# Altium PCB UMParachuteContr.PcbDoc
Units mm, origin at the board's own origin, x right, y up, seen from the top; angles counter-clockwise.
Board outline 70 x 70 mm, 2 copper layers (Top Layer, Bottom Layer); 109 components, 71 nets, 416 pads, 4 vias.
Unrouted connection lines stored in the file: 271.
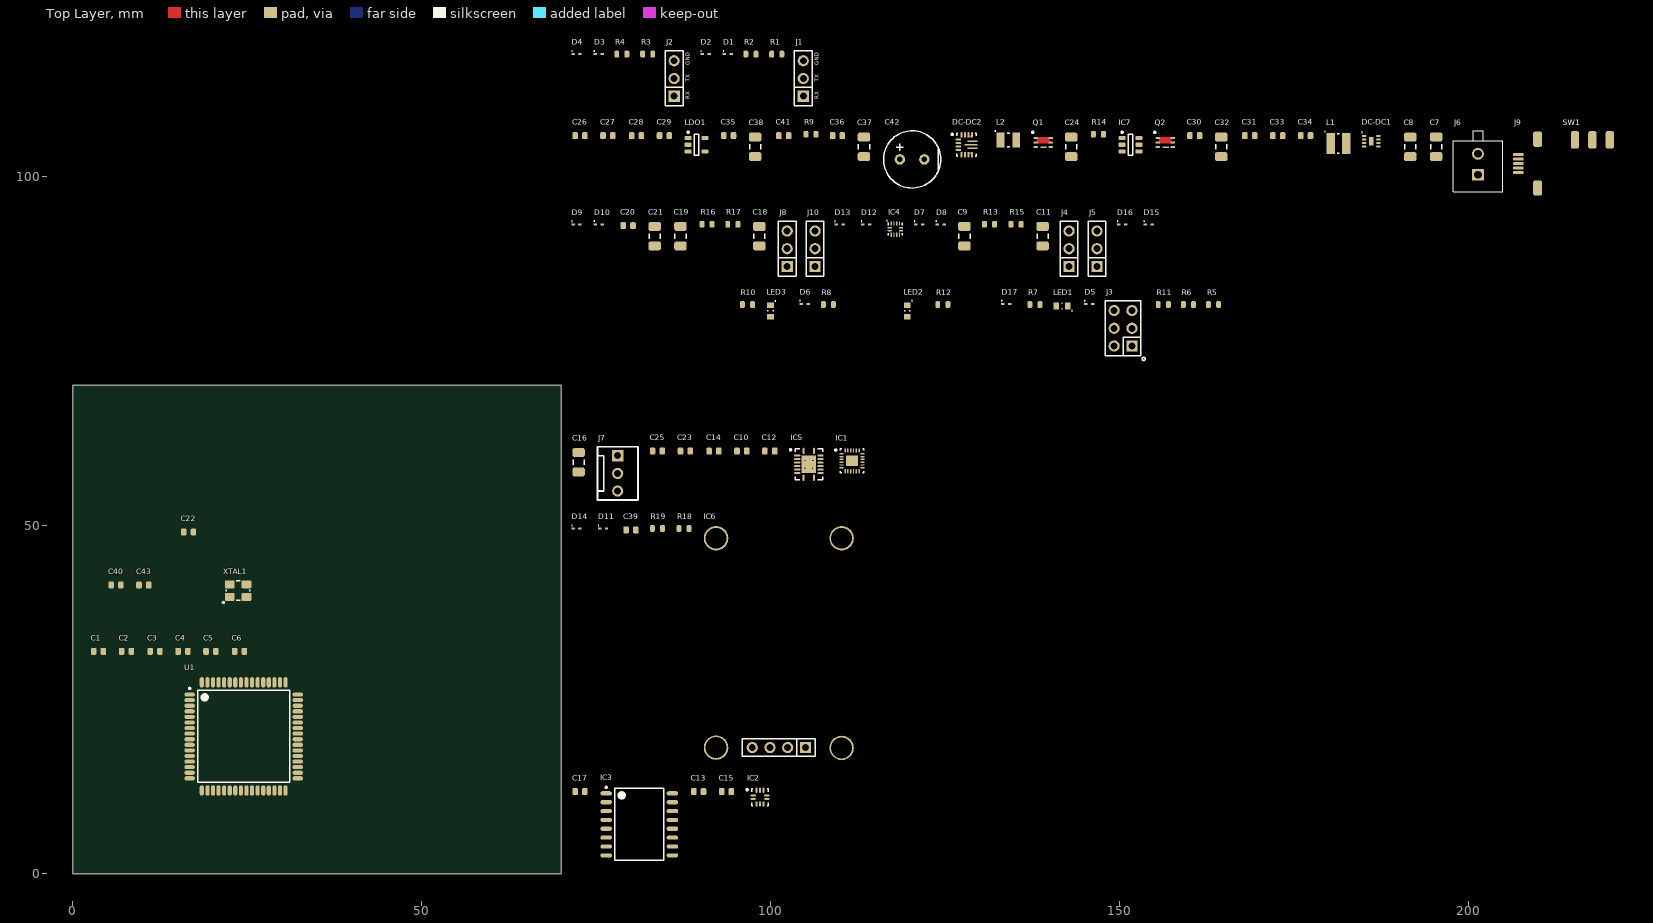
[diagram p0: Top Layer view]
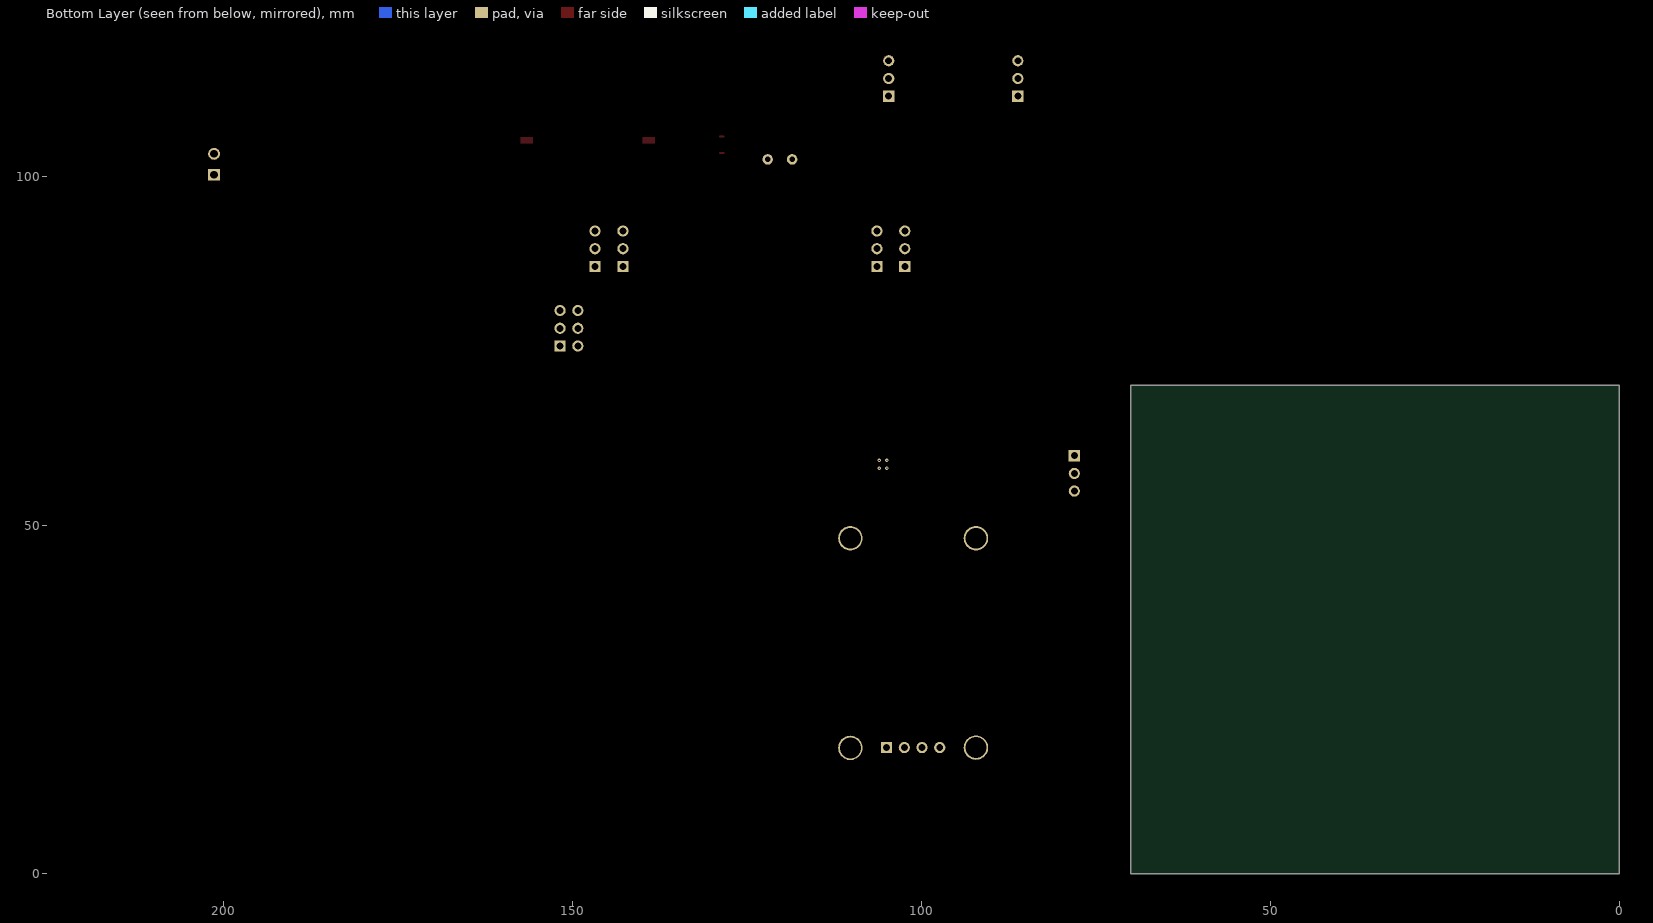
[diagram p1: Bottom Layer view, seen from below]

## Layer stack, top to bottom
Top Solder: solder mask 0.0102, Solder Resist, Dk 3.5
Top Layer: signal copper 0.0356
Dielectric 1: dielectric 0.32, FR-4, Dk 4.8
Bottom Layer: signal copper 0.0356
Bottom Solder: solder mask 0.0102, Solder Resist, Dk 3.5

## Board outline
0,0 70,0 70,70 0,70

## Design rules (kind name [scope] priority, off if disabled: settings)
Clearance [All] p1: gap=0.2 ignorepadtopadclearanceinfootprint=TRUE
PolygonConnect [All] p1: connectstyle=Relief reliefconductorwidth=0.254 reliefentries=4 polygonreliefangle="90 Angle" airgapwidth=0.254
RoutingVias [All] p1: holewidth=0.711 width=1.27 viastyle="Through Hole" minholewidth=0.711 minwidth=1.27 maxholewidth=0.711 maxwidth=1.27
SolderMaskExpansion [All] p1: expansion=0.102
Width [All] p1: maxlimit=1 minlimit=0.15 preferedwidth=0.2
30 further rules are at their usual default settings.

## Classes and differential pairs
component class U_Uarts: D1 D2 D3 D4 J1 J2 R1 R2 R3 R4
component class U_Power: C7 C8 C24 C26 C27 C28 C29 C30 C31 C32 C33 C34 C35 C36 C37 C38 C41 C42 DC-DC1 DC-DC2 IC7 J6 J9 L1 L2 LDO1 Q1 Q2 R9 R14 SW1
component class U_Motors: C9 C11 C18 C19 C20 C21 D7 D8 D9 D10 D12 D13 D15 D16 IC4 J4 J5 J8 J10 R13 R15 R16 R17
component class U_MCU: C1 C2 C3 C4 C5 C6 C22 C40 C43 D5 D6 D17 J3 LED1 LED2 LED3 R5 R6 R7 R8 R10 R11 R12 U1 XTAL1
component class U_IMUAndSonar: C10 C12 C14 C16 C23 C25 IC1 IC5 J7
component class U_GPS: C39 D11 D14 IC6 R18 R19
component class U_Barometers: C13 C15 C17 IC2 IC3

## Components (designator, comment, footprint, x,y, rotation, side; value= is the part's Value field where it differs from the comment)
C1 "100nF *V" "C0603 N" 3.7,31.9 r0 top
C2 "100nF *V" "C0603 N" 7.7,31.9 r0 top
C3 "100nF *V" "C0603 N" 11.8,31.9 r0 top
C4 "100nF *V" "C0603 N" 15.8,31.9 r0 top
C5 "100nF *V" "C0603 N" 19.8,31.9 r0 top
C6 "100nF *V" "C0603 N" 23.9,31.9 r0 top
C7 "10uF *V" "C1206 N" 195.4,104.2 r90 top
C8 "10uF *V" "C1206 N" 191.7,104.2 r90 top
C9 "10uF 25V" "C1206 N" 127.8,91.4 r90 top
C10 "100nF *V" "C0603 N" 95.9,60.6 r0 top
C11 "10uF 25V" "C1206 N" 139,91.4 r90 top
C12 "100nF *V" "C0603 N" 99.9,60.6 r0 top
C13 "100nF *V" "C0603 N" 89.7,11.8 r0 top
C14 "100nF *V" "C0603 N" 91.9,60.6 r0 top
C15 "100nF *V" "C0603 N" 93.7,11.8 r0 top
C16 "10uF *V" "C1206 N" 72.5,59 r90 top
C17 "100nF *V" "C0603 N" 72.7,11.8 r0 top
C18 "10uF 25V" "C1206 N" 98.4,91.4 r90 top
C19 "10uF 25V" "C1206 N" 87.1,91.4 r90 top
C20 "100nF *V" "C0603 N" 79.6,92.9 r0 top
C21 "100nF *V" "C1206 N" 83.4,91.4 r90 top
C22 "100nF *V" "C0603 N" 16.6,49 r0 top
C23 "100nF *V" "C0603 N" 87.8,60.6 r0 top
C24 "10uF *V" "C1206 N" 143.1,104.2 r90 top
C25 "100nF *V" "C0603 N" 83.8,60.6 r0 top
C26 "1uF *V" "C0603 N" 72.7,105.8 r0 top
C27 "100nF *V" "C0603 N" 76.7,105.8 r0 top
C28 "100nF *V" "C0603 N" 80.8,105.8 r0 top
C29 "4.7uF *V" "C0603 N" 84.8,105.8 r0 top
C30 "560pF *V" "C0603 N" 160.8,105.8 r0 top
C31 "100nF *V" "C0603 N" 168.7,105.8 r0 top
C32 "10uF *V" "C1206 N" 164.6,104.2 r90 top
C33 "100nF *V" "C0603 N" 172.7,105.8 r0 top
C34 "4.7uF *V" "C0603 N" 176.7,105.8 r0 top
C35 "100nF *V" "C0603 N" 94,105.8 r0 top
C36 "100nF *V" "C0603 N" 109.6,105.8 r0 top
C37 "22uF *V" "C1206 N" 113.4,104.2 r90 top
C38 "10uF *V" "C1206 N" 97.8,104.2 r90 top
C39 "1uF *V" "C0603 N" 80,49.3 r0 top
C40 "5pF *V" "C0603 N" 6.2,41.4 r0 top
C41 "100nF *V" "C0603 N" 101.9,105.8 r0 top
C42 "100uF *V" AL_8x12.5x3.5 120.3,102.4 r0 top
C43 "5pF *V" "C0603 N" 10.2,41.4 r0 top
D1 "ESD9L3.3ST5G" "SOD923F, NOMINAL" 93.9,117.5 r0 top
D2 "ESD9L3.3ST5G" "SOD923F, NOMINAL" 90.7,117.5 r0 top
D3 "ESD9L3.3ST5G" "SOD923F, NOMINAL" 75.4,117.5 r0 top
D4 "ESD9L3.3ST5G" "SOD923F, NOMINAL" 72.2,117.5 r0 top
D5 "ESD9L3.3ST5G" "SOD923F, NOMINAL" 145.7,81.7 r0 top
D6 "ESD9L3.3ST5G" "SOD923F, NOMINAL" 104.9,81.7 r0 top
D7 "ESD9L5.0ST5G" "SOD923F, NOMINAL" 121.3,93.1 r0 top
D8 "ESD9L5.0ST5G" "SOD923F, NOMINAL" 124.4,93.1 r0 top
D9 "ESD9L5.0ST5G" "SOD923F, NOMINAL" 72.2,93.1 r0 top
D10 "ESD9L5.0ST5G" "SOD923F, NOMINAL" 75.4,93.1 r0 top
D11 "ESD9L3.3ST5G" "SOD923F, NOMINAL" 76,49.5 r0 top
D12 "ESD9L5.0ST5G" "SOD923F, NOMINAL" 113.7,93.1 r0 top
D13 "ESD9L5.0ST5G" "SOD923F, NOMINAL" 109.9,93.1 r0 top
D14 "ESD9L3.3ST5G" "SOD923F, NOMINAL" 72.2,49.5 r0 top
D15 "ESD9L5.0ST5G" "SOD923F, NOMINAL" 154.2,93.1 r0 top
D16 "ESD9L5.0ST5G" "SOD923F, NOMINAL" 150.4,93.1 r0 top
D17 "ESD9L3.3ST5G" "SOD923F, NOMINAL" 133.8,81.7 r0 top
DC-DC1 "MIC23050" "QFN-8 2x2MM, NOMINAL" 186.1,105 r0 top
DC-DC2 "TPS63070" "VQFN-15, 2.5x3MM, NOMINAL" 128.1,104.5 r0 top
IC1 "ICM-20948" "QFN-24, 3x3MM, NOMINAL" 111.7,59.2 r0 top
IC2 "LPS22HBTR" "HLGA-10L, Nominal" 98.5,11 r0 top
IC3 "SM9333/6" "SOIC16, NOMINAL" 81.2,7.1 r0 top
IC4 "FXMA2104" "QFN12 1.8x1.8, NOMINAL" 117.9,92.4 r0 top
IC5 "TXB0106" "VQFN-16, 4x3.5MM, NOMINAL" 105.5,58.7 r0 top
IC6 "NEO-6M" "NEO-6M Module" 101.2,18.1 r90 top
IC7 "LTC4412" "SOT-23-6, NOMINAL" 151.6,104.5 r0 top
J1 "DebugUART" UART_HEADER 104.7,114 r90 top
J2 "ExtUART" UART_HEADER 86.2,114 r90 top
J3 "AVR PDI header" "Male 2x3 vertical" 151.8,78.2 r90 top
J4 "header 1x3 vertical" "Male 1x3 vertical" 142.8,89.6 r90 top
J5 "header 1x3 vertical" "Male 1x3 vertical" 146.8,89.6 r90 top
J6 "44914-0201" 44914-0201 201.4,101.7 r0 top
J7 "Molex 2.54 3pin" 22-27-2031 78.1,57.4 r90 top
J8 "header 1x3 vertical" "Male 1x3 vertical" 102.4,89.6 r90 top
J9 "MICRO-B" MICRO-B 209.7,101.8 r90 top
J10 "header 1x3 vertical" "Male 1x3 vertical" 106.4,89.6 r90 top
L1 "LPS3010-102MRB" LPS3010 181.4,104.7 r0 top
L2 "SRP2510A-1R5M" SRP2510A 134.1,105.2 r0 top
LDO1 "XC6221B182MR" "SOT-23-5, Nominal" 89.4,104.5 r0 top
LED1 "DebugLED1" "0603 NOMINAL" 141.8,81.4 r0 top
LED2 "DebugLED2" "0603 NOMINAL" 119.6,80.7 r90 top
LED3 "DebugLED3" "0603 NOMINAL" 100,80.7 r90 top
Q1 "SIA461DJ-T1-GE3" "SC70-6L POWERPACK" 139.1,104.8 r0 top
Q2 "SIA461DJ-T1-GE3" "SC70-6L POWERPACK" 156.6,104.8 r0 top
R1 "330R" R0603 100.9,117.5 r0 top
R2 "1K" R0603 97.2,117.5 r0 top
R3 "330R" R0603 82.4,117.5 r0 top
R4 "1K" R0603 78.7,117.5 r0 top
R5 "4.7K" R0603 163.5,81.6 r0 top
R6 "4.7K" R0603 159.9,81.6 r0 top
R7 "1.2K" R0603 137.9,81.6 r0 top
R8 "1.2K" R0603 108.3,81.6 r0 top
R9 "10K" R0603 105.8,106 r0 top
R10 "1.2K" R0603 96.7,81.6 r0 top
R11 "1K" R0603 156.3,81.6 r0 top
R12 "1K" R0603 124.7,81.6 r0 top
R13 "1K TBD" R0603 131.4,93.1 r0 top
R14 "470K" R0603 147,106 r0 top
R15 "1K TBD" R0603 135.2,93.1 r0 top
R16 "1K TBD" R0603 90.9,93.1 r0 top
R17 "1K TBD" R0603 94.6,93.1 r0 top
R18 "1K" R0603 87.6,49.5 r0 top
R19 "330R" R0603 83.8,49.5 r0 top
SW1 "JS102011SAQN" JS102011SAQN 217.8,102.2 r0 top
U1 "ATXMEGA256A3U" "TQFP-64, NOMINAL" 24.5,19.7 r0 top
XTAL1 "7M-16.000MAAJ-T" "7M 3.2x2.5mm" 23.7,40.6 r0 top

## Footprints (in the part's own frame and the unit in brackets; to place one, negate y for a bottom-side part, rotate by r counter-clockwise, add the part's x,y. Pads: shape width x height; smd on the part's side, far side on the other; paste and mask are expansions set on the pad)
"7M 3.2x2.5mm" [mm] "7M series crystal 3.2x2.5mm"
  rrect30% 1.4x1.15 smd: 1(-1.2,-0.9) 2(1.2,-0.9) 3(1.2,0.9) 4(-1.2,0.9)
  silkscreen extent -2.24,-1.84 1.7,1.4, body extent -1.7,-1.35 1.7,1.35, height 3.14
22-27-2031 [mm] "Molex KK 6410 series 3pin header"
  rect 1.6x1.6 hole 1: 1(2.54,0)
  round 1.6 hole 1: 2(0,0) 3(-2.54,0)
  silkscreen extent -3.81,-2.9 3.81,2.9, body extent -3.81,-2.9 3.81,2.9, height 11.72
"0603 NOMINAL" [mm] "Chip Diode, 2-Leads, Body 1,60x0,80mm, IPC Medium Density"
  rect 0.8x0.95 smd: A(-0.825,0) C(0.825,0)
  silkscreen extent -0.05,-0.74 1.49,0.38, body extent -0.8,-0.4 0.8,0.4, height 0.6
44914-0201 [mm] "Micro-Fit CPI Header, Capable Pin Interface, Dual Row, Vertical, 2 pin"
  round 0 hole 1.05 unplated: 0(-3,2.44) 0(3,2.44)
  rect 1.7x1.7 hole 1.1: 1(0,-1.5)
  round 1.7 hole 1.1: 2(0,1.5)
  silkscreen extent -3.58,-3.97 3.58,4.8, body extent -3.58,-3.97 3.57,4.8, height 9.91
AL_8x12.5x3.5 [mm] "Aluminium Electrolytic Cap, D 8mm, H 12.5mm, pitch 3.5mm"
  round 1.5 hole 0.8: 1(-1.75,0) 2(1.75,0)
  silkscreen extent -4.1,-4.1 4.1,4.1, body extent -4,-4 4.01,4, height 12.51
"C0603 N" [mm] "Chip Capacitor, 2-Leads, Body 1.68x0.80mm, IPC Medium Density"
  rrect50% 0.8x1 smd: 1(-0.7,0) 2(0.7,0)
  body extent -0.8,-0.4 0.8,0.4, height 0.8
"C1206 N" [mm] "Chip Capacitor, 2-Leads, Body 3.20x1.60mm, IPC Medium Density"
  rrect50% 1.3x1.8 smd: 1(-1.4,0) 2(1.4,0)
  silkscreen extent -0.35,-0.8 0.35,0.8, body extent -1.7,-0.9 1.7,0.9, height 1.25
"HLGA-10L, Nominal" [mm]
  oval 0.75x0.25 smd: 1(-0.975,0.25) 2(-0.975,-0.25) 6(0.975,-0.25) 7(0.975,0.25)
  oval 0.25x0.75 smd: 3(-0.5,-0.975) 4(0,-0.975) 5(0.5,-0.975) 8(0.5,0.975) 9(0,0.975) 10(-0.5,0.975)
  silkscreen extent -1.97,-1.2 1.2,1.2, body extent -1,-1 1,1, height 0.81
JS102011SAQN [mm]
  rrect50% 1.2x2.5 smd paste+0: 1(-2.5,3) 2(0,3) 3(2.5,3)
  rrect50% 0x0 hole 0.9 paste+0: 4(-3.4,0) 5(3.4,0)
  body extent -4.5,-3.75 4.5,3.75, height 3.51
LPS3010 [mm] "Chip Inductor, 2-Leads, Body 2,95x2,95mm, IPC High Density"
  rect 1.19x2.99 smd: 1(-1.11,0) 2(1.11,0)
  silkscreen extent -1.97,-1.39 0.15,1.76, body extent -1.51,-1.51 1.52,1.52, height 1.01
"Male 1x3 vertical" [mm]
  rect 1.6x1.6 hole 1: 1(-2.54,0)
  round 1.6 hole 1: 2(0,0) 3(2.54,0)
  silkscreen extent -3.94,-1.27 3.94,1.27, body extent -3.81,-1.27 3.81,1.27, height 8.54
"Male 2x3 vertical" [mm]
  rect 1.6x1.6 hole 1: 1(-2.54,0)
  round 1.6 hole 1: 2(-2.54,2.54) 3(0,0) 4(0,2.54) 5(2.54,0) 6(2.54,2.54)
  silkscreen extent -4.62,-1.92 3.94,3.81, body extent -3.81,-1.27 3.81,3.81, height 8.54
MICRO-B [mm]
  rrect50% 0.45x1.5 smd: 1(-1.3,2.5) 2(-0.65,2.5) 3(0,2.5) 4(0.65,2.5) 5(1.3,2.5)
  rrect50% 2.2x1.3 smd: 6(-3.5,-0.25) 6(3.5,-0.25)
  body extent -3.9,-2.35 3.9,2.65, height 2.69
"NEO-6M Module" [mm]
  rect 1.6x1.6 hole 1: 1(0,-3.81)
  round 1.6 hole 1: 2(0,-1.27) 3(0,1.27) 4(0,3.81)
  round 3.5 hole 3: 5(-0.05,-9) 5(0,9) 5(30,-9) 5(30,9)
  silkscreen extent -1.27,-5.21 1.27,5.21, body extent -2,-11 32,11, height 10
"QFN12 1.8x1.8, NOMINAL" [mm] "QFN, 12-Leads, Body 1,80x1,80mm, Pitch 0,40mm, IPC Medium Density"
  rrect50% 0.6x0.2 smd: 1(-0.8,0.2) 2(-0.8,-0.2) 7(0.8,-0.2) 8(0.8,0.2)
  rrect50% 0.2x0.6 smd: 3(-0.6,-0.8) 4(-0.2,-0.8) 5(0.2,-0.8) 6(0.6,-0.8) 9(0.6,0.8) 10(0.2,0.8) 11(-0.2,0.8) 12(-0.6,0.8)
  silkscreen extent -1.25,-0.9 1,1.25, body extent -0.91,-0.91 0.91,0.91, height 0.61
"QFN-8 2x2MM, NOMINAL" [mm] "QFN, 8-Leads, Body 2,00x2,00mm, Pitch 1,50mm/0,50mm, Thermal Pad 0,60x1,20mm, IPC Medium Density"
  oval 0.65x0.25 smd: 1(-1.025,0.75) 2(-1.025,0.25) 3(-1.025,-0.25) 4(-1.025,-0.75) 5(1.025,-0.75) 6(1.025,-0.25) 7(1.025,0.25) 8(1.025,0.75)
  rect 0.6x1.2 smd: 8(0,0)
  silkscreen extent -1.35,1.25 -1.25,1.35, body extent -1.05,-1 1.05,1, height 0.96
"QFN-24, 3x3MM, NOMINAL" [mm] "QFN, 24-Leads, Body 3,00x3,00mm, Pitch 0,40mm, Thermal Pad 1,70x1,54mm, IPC Medium Density"
  oval 0.6x0.2 smd: 1(-1.5,1) 2(-1.5,0.6) 3(-1.5,0.2) 4(-1.5,-0.2) 5(-1.5,-0.6) 6(-1.5,-1) 13(1.5,-1) 14(1.5,-0.6) 15(1.5,-0.2) 16(1.5,0.2) 17(1.5,0.6) 18(1.5,1)
  oval 0.2x0.6 smd: 7(-1,-1.5) 8(-0.6,-1.5) 9(-0.2,-1.5) 10(0.2,-1.5) 11(0.6,-1.5) 12(1,-1.5) 19(1,1.5) 20(0.6,1.5) 21(0.2,1.5) 22(-0.2,1.5) 23(-0.6,1.5) 24(-1,1.5)
  rect 1.7x1.54 smd: 25(0,0)
  silkscreen extent -2.47,-1.7 1.7,1.7, body extent -1.51,-1.51 1.5,1.5, height 1.01
R0603 [mm] "0603 Resistor, Nominal, Round"
  rrect50% 0.7x0.95 smd: 1(-0.725,0) 2(0.725,0)
  body extent -0.8,-0.4 0.8,0.4, height 0.45
"SC70-6L POWERPACK" [mm] "QFN, 6-Leads, Body 2,15x2,05mm, Pitch 0,65mm, IPC Medium Density"
  oval 0.65x0.3 smd: D(-1.075,0) D(-1.075,0.65) D(1.075,0) D(1.075,0.65) G(-1.075,-0.65) S(1.075,-0.65)
  rect 0.87x0.235 smd: S(0.05,-0.65)
  Top Layer region: -0.9,-0.15 0.9,-0.15 0.9,0.8 -0.9,0.8
  silkscreen extent -1.65,1.35 -1.4,1.6, body extent -1.03,-1.03 1.03,1.02, height 0.79
"SOD923F, NOMINAL" [mm] "SODFL, 2-Leads, Body 0,60x1,00mm, IPC Medium Density"
  rrect50% 0.5x0.3 smd: A(0.5,0) C(-0.5,0)
  silkscreen extent -0.7,0.4 -0.6,0.5, body extent -0.52,-0.32 0.53,0.33, height 0.44
"SOIC16, NOMINAL" [mm] "SOIC, 16-Leads, Body 10,26x7,52mm, Pitch 1,27mm, IPC Medium Density"
  oval 1.65x0.6 smd: 1(-4.75,4.445) 2(-4.75,3.175) 3(-4.75,1.905) 4(-4.75,0.635) 5(-4.75,-0.635) 6(-4.75,-1.905) 7(-4.75,-3.175) 8(-4.75,-4.445) 9(4.75,-4.445) 10(4.75,-3.175) 11(4.75,-1.905) 12(4.75,-0.635) 13(4.75,0.635) 14(4.75,1.905) 15(4.75,3.175) 16(4.75,4.445)
  silkscreen extent -4.87,-5.15 3.52,5.42, body extent -5.15,-5.1 5.15,5.1, height 3.51
"SOT-23-5, Nominal" [mm] "SOT23, 5-Leads, Body 2.90x2.38mm, Pitch 0.95mm, IPC Medium Density"
  rrect50% 1x0.6 smd: 1(-1.2,0.95) 2(-1.2,0) 3(-1.2,-0.95) 4(1.2,-0.95) 5(1.2,0.95)
  silkscreen extent -1.32,-1.5 0.3,1.92, body extent -1.4,-1.45 1.4,1.45, height 1.45
"SOT-23-6, NOMINAL" [mm] "SOT23, 6-Leads, Body 2.90x2.45mm, Pitch 0.95mm, IPC Medium Density"
  rrect50% 1x0.6 smd: 1(-1.2,0.95) 2(-1.2,0) 3(-1.2,-0.95) 4(1.2,-0.95) 5(1.2,0) 6(1.2,0.95)
  silkscreen extent -1.32,-1.5 0.3,1.92, body extent -1.17,-1.46 1.17,1.46, height 1
SRP2510A [mm] "Chip Inductor, 2-Leads, Body 2,50x2,00mm, IPC Medium Density"
  rect 1.1x2.14 smd: 1(-1.13,0) 2(1.13,0)
  silkscreen extent -1.94,-0.97 0.2,1.33, body extent -1.25,-1 1.25,1, height 1
"TQFP-64, NOMINAL" [mm] "TQFP, 64-Leads, Body 14,00x14,00mm, Pitch 0,80mm, IPC Medium Density"
  oval 1.5x0.6 smd: 1(-7.75,6) 2(-7.75,5.2) 3(-7.75,4.4) 4(-7.75,3.6) 5(-7.75,2.8) 6(-7.75,2) 7(-7.75,1.2) 8(-7.75,0.4) 9(-7.75,-0.4) 10(-7.75,-1.2) 11(-7.75,-2) 12(-7.75,-2.8) 13(-7.75,-3.6) 14(-7.75,-4.4) 15(-7.75,-5.2) 16(-7.75,-6) 33(7.75,-6) 34(7.75,-5.2) 35(7.75,-4.4) 36(7.75,-3.6) 37(7.75,-2.8) 38(7.75,-2) 39(7.75,-1.2) 40(7.75,-0.4) 41(7.75,0.4) 42(7.75,1.2) 43(7.75,2) 44(7.75,2.8) 45(7.75,3.6) 46(7.75,4.4) 47(7.75,5.2) 48(7.75,6)
  oval 0.6x1.5 smd: 17(-6,-7.75) 18(-5.2,-7.75) 19(-4.4,-7.75) 20(-3.6,-7.75) 21(-2.8,-7.75) 22(-2,-7.75) 23(-1.2,-7.75) 24(-0.4,-7.75) 25(0.4,-7.75) 26(1.2,-7.75) 27(2,-7.75) 28(2.8,-7.75) 29(3.6,-7.75) 30(4.4,-7.75) 31(5.2,-7.75) 32(6,-7.75) 49(6,7.75) 50(5.2,7.75) 51(4.4,7.75) 52(3.6,7.75) 53(2.8,7.75) 54(2,7.75) 55(1.2,7.75) 56(0.4,7.75) 57(-0.4,7.75) 58(-1.2,7.75) 59(-2,7.75) 60(-2.8,7.75) 61(-3.6,7.75) 62(-4.4,7.75) 63(-5.2,7.75) 64(-6,7.75)
  silkscreen extent -7.87,-6.6 6.6,7, body extent -8,-8 8,8, height 1.11
UART_HEADER [mm]
  rect 1.6x1.6 hole 1: 1(-2.54,0)
  round 1.6 hole 1: 2(0,0) 3(2.54,0)
  silkscreen extent -3.94,-1.27 3.94,1.27, body extent -3.81,-1.27 3.81,1.27, height 8.54
"VQFN-15, 2.5x3MM, NOMINAL" [mm] "QFN, 15-Leads, Body 2,50x3,00mm, Pitch 0,50mm, IPC Medium Density"
  oval 0.8x0.25 smd: 1(-1.175,0.75) 2(-1.175,0.25) 3(-1.175,-0.25) 4(-1.175,-0.75)
  oval 0.25x0.8 smd: 5(-0.725,-1.425) 6(-0.225,-1.425) 7(0.275,-1.425) 8(0.775,-1.425) 12(0.775,1.425) 13(0.275,1.425) 14(-0.225,1.425) 15(-0.725,1.425)
  oval 1.5x0.25 smd: 9(0.85,-0.5) 11(0.85,0.5)
  oval 1.9x0.25 smd: 10(0.65,0)
  Top Layer lines w0.3: 0.3,-1.175 0.75,-1.175 ; 0.3,1.175 0.75,1.175
  silkscreen extent -2.17,-1.65 1.4,1.65, body extent -1.3,-1.55 1.3,1.55, height 1.05
"VQFN-16, 4x3.5MM, NOMINAL" [mm] "QFN, 16-Leads, Body 3,50x4,00mm, Pitch 1,50mm/0,50mm, Thermal Pad 2,05x2,55mm, IPC Medium Density"
  oval 0.25x0.9 smd: 1(-0.75,1.925) 8(-0.75,-1.925) 9(0.75,-1.925) 16(0.75,1.925)
  oval 0.9x0.25 smd: 2(-1.675,1.25) 3(-1.675,0.75) 4(-1.675,0.25) 5(-1.675,-0.25) 6(-1.675,-0.75) 7(-1.675,-1.25) 10(1.675,-1.25) 11(1.675,-0.75) 12(1.675,-0.25) 13(1.675,0.25) 14(1.675,0.75) 15(1.675,1.25)
  rect 2.05x2.55 smd: 9(0,0)
  silkscreen extent -2.75,-2.22 1.97,2.22, body extent -1.83,-2.07 1.83,2.07, height 1

## Part data
C1 C2 C3 C4 C5 C6 C10 C12 C13 C14 C15 C17 C20 C21 C22 C23 C25 C27 C28 C31 C33 C35 C36 C41: library part Capacitor, "Ceramic capacitor", Capacitance=100nF, Voltage rating=*V, Note=CurrentFootprint, Type=MLCC
C7 C8 C16 C24 C32 C38: library part Capacitor, "Ceramic capacitor", Capacitance=10uF, Voltage rating=*V, Note=CurrentFootprint, Type=MLCC
C9 C11 C18 C19: library part Capacitor, "Ceramic capacitor", Capacitance=10uF, Voltage rating=25V, Characteristic=X7R, Note=CurrentFootprint, Type=MLCC
C26 C39: library part Capacitor, "Ceramic capacitor", Capacitance=1uF, Voltage rating=*V, Note=CurrentFootprint, Type=MLCC
C29 C34: library part Capacitor, "Ceramic capacitor", Capacitance=4.7uF, Voltage rating=*V, Note=CurrentFootprint, Type=MLCC
C30: library part Capacitor, "Ceramic capacitor", Capacitance=560pF, Voltage rating=*V, Note=CurrentFootprint, Type=MLCC
C37: library part Capacitor, "Ceramic capacitor", Capacitance=22uF, Voltage rating=*V, Note=CurrentFootprint, Type=MLCC
C40 C43: library part Capacitor, "Ceramic capacitor", Capacitance=5pF, Voltage rating=*V, Note=CurrentFootprint, Type=MLCC
C42: library part "Capacitor Polarized", "Polarized Capacitor", Capacitance=100uF, Temp MAX=*C, Voltage rating=*V, ESR=*R, Note=CurrentFootprint, Temp MIN=*C
D1 D2 D3 D4 D5 D6 D11 D14 D17: "TVS DIODE, Unidir, 3.3V/9V, 150mW, SOD-923, ESD9L3.3ST5G, ON SEMICONDUCTOR", Breakdown Voltage=4.8V, Case/Package=SOD-923-2, Clamping Voltage=9V, Leakage Current=1uA, Manufacturer="ON Semiconductor", Operating Temperature Range="-55 .. 125°C", Peak Pulse Current=1A, Peak Pulse Power=150mW, Reverse Standoff Voltage=3.3V, Supplier Part Number 1=2533269, ComponentLink1Description=Datasheet, ComponentLink1URL=https://www.verical.com/server-webapp/html/getDatasheet?partID=148186&src-supplier=Verical, Manufacturer Part Number=ESD9L3.3ST5G, Supplier 1=Farnell
D7 D8 D9 D10 D12 D13 D15 D16: "TVS DIODE, Unidir, 5V/9.8V, 150mW, SOD-923, ESD9L5.0ST5G, ON SEMICONDUCTOR", Breakdown Voltage="5.4 .. 5.8V", Clamping Voltage=9.8V, Leakage Current=1uA, Manufacturer="ON Semiconductor", Max Surge Current=1A, Operating Supply Voltage=5V, Operating Temperature Range="-55 .. 150°C", Peak Pulse Power=150mW, Supplier Part Number 1=1651639RL, ComponentLink1Description=Datasheet, ComponentLink1URL=http://www.mouser.com/ds/2/308/ESD9L-D-278322.pdf?src-supplier=Mouser, Manufacturer Part Number=ESD9L5.0ST5G, Peak Pulse Current=1A, Reverse Standoff Voltage=5V, Supplier 1=Farnell, Supplier 2=TME, Supplier Part Number 2=ESD9L5.0ST5G
DC-DC1: "DC-DC CONVERTER, 3.3Vout, 600mA, 2.7-5.5Vin, MIC23050, MICREL", Supplier Part Number 1=2920748, ComponentLink1Description=Datasheet, ComponentLink1URL=http://ww1.microchip.com/downloads/en/DeviceDoc/mic23050.pdf, Supplier 1=Farnell
DC-DC2: "DC-DC CONVERTER, 5Vout, 2 .. 16Vin, buck-boost, 2A, TPS63070, TEXAS INSTRUMENTS", Supplier Part Number 1=3008245, ComponentLink1Description=Datasheet, ComponentLink1URL=http://www.ti.com/lit/ds/symlink/tps63070.pdf, Supplier 1=Farnell
IC1: "9-axis IMU, SPI and I2C, 1.8Vin, 24QFN", Supplier Part Number 1=2911498, ComponentLink1Description=Datasheet, ComponentLink1URL=https://www.invensense.com/wp-content/uploads/2016/06/DS-000189-ICM-20948-v1.3.pdf, Supplier 1=Farnell
IC2: "Pressure Sensor, 260-1260 hPa, 1Hz...75Hz, 1.7...3.6Vin, 12uA, 24-bit, LPS22HBTR, HLGA-10L, STMicroelectronics", Supplier Part Number 1=2532382, ComponentLink1Description=Datasheet, ComponentLink1URL=https://www.st.com/resource/en/datasheet/lps22hb.pdf, Supplier 1=Farnell
IC3: "Differentsial sensor, 125 or 250 Pa, 2000Hz, 3.0-5.5Vin", ComponentLink1Description=Datasheet, ComponentLink1URL=https://www.mouser.com/datasheet/2/589/Datasheet_SM9333_SM9336-1317493.pdf
IC4: "Level shifter, 4 inputs, 1.65 .. 5.5Vin, 3ns delay, FXMA2104, ON SEMICONDUCTOR", Supplier Part Number 1=2822577, ComponentLink1Description=Datasheet, ComponentLink1URL=http://www.farnell.com/datasheets/2552660.pdf?_ga=2.61529188.991561592.1575804886-1961576694.1568451101, Supplier 1=Farnell
IC5: "Level shifter, 6 inputs, 1.2 .. 5.5Vin, 4ns delay, TXB0106, TEXAS INSTRUMENTS", Supplier Part Number 1=3120970, ComponentLink1Description=Datasheet, ComponentLink1URL=http://www.ti.com/lit/ds/symlink/txb0106.pdf, Supplier 1=Farnell
IC6: "GPS GLONASS module with antenna, +-2m, -162dBm, 3 .. 5Vin", ComponentLink1Description=Datasheet, ComponentLink1URL=https://www.u-blox.com/sites/default/files/products/documents/NEO-6_DataSheet_(GPS.G6-HW-09005).pdf
IC7: "Hot Swap Controller, 2.5 .. 28Vin, 11uA, LTC4412, LINEAR TECHNOLOGY", Supplier Part Number 1=584-LTC4412ES6#TRPBF, ComponentLink1Description=Datasheet, ComponentLink1URL=https://www.mouser.ee/datasheet/2/609/4412fb-1268394.pdf, Supplier 1=Mouser
J1 J2: library part "header 1x3 vertical"
J3: library part "AVR PDI header 2x3 male", "Male header 2x3, PDI"
J6: "MicroFit 2-pin CPI Header, 2 Row, Vertical", Color=Black, Current Rating=5A, Flammability Rating="UL94 V-0", Manufacturer=Molex, Operating Temperature=-40...105°C, Package Quantity=3168, Supplier Part Number 1=538-44914-0201, Voltage rating=250V, ComponentLink1Description=http://www.mouser.com/ds/2/276/0449140201_PCB_HEADERS-146076.pdf?src-supplier=Mouser, ComponentLink1URL=http://www.mouser.com/ds/2/276/0449140201_PCB_HEADERS-146076.pdf?src-supplier=Mouser, ComponentLink2Description=http://www.onlinecomponents.com/productFiles/mf-MOL/0449140201_pcb_headers.pdf?src-supplier=Onlinecomponents.com, ComponentLink2URL=http://www.onlinecomponents.com/productFiles/mf-MOL/0449140201_pcb_headers.pdf?src-supplier=Onlinecomponents.com, Contact Plating=Tin, Glow Wire Compliant=Compliant, Halogen Free="Low Halogen", Housing Material=Thermoplastic, Manufacturer Part Number=44914-0201, Mount="Through Hole", Number of Circuits=2, Number of Contacts=2, Number of Positions=2, Number of Rows=2, Orientation=Vertical, Packaging=Tray, Pitch=3mm, REACH SVHC="No SVHC", Row Spacing=3mm, Stock 1=1889, Supplier 1=Mouser, Termination=Solder, Voltage Rating (DC)=250V
J7: library part "Molex header, 3 pin, KK 6410 series", "Molex header, 3 pin, KK 6410 series", Current Rating=4A, Manufacturer Part Number=22-27-2031, Supplier Part Number 1=9731156, ComponentLink1Description=Datasheet, ComponentLink1URL=http://www.farnell.com/datasheets/1023435.pdf, ComponentLink2Description=Drawing, ComponentLink2URL=http://www.farnell.com/cad/1595526.pdf, Product Range="KK 6410 Series", Supplier 1=Farnell, Supplier 2=Mouser, Supplier 3=TME, Supplier Part Number 2=538-22-27-2031, Supplier Part Number 3=MX-6410-03A
J9: "Micro USB 2.0 type B, receptacle", Manufacturer=Molex, Manufacturer Part Number=47346-1001, Operating Temperature Range="-30 .. 85°C", Supplier Part Number 1=2779944, ComponentLink1Description=Datasheet, ComponentLink1URL=http://www.farnell.com/datasheets/2696879.pdf, Orientation="Right Angle", Pitch=0.65mm, Supplier 1=Farnell, Supplier 2=Mouser, Supplier Part Number 2=538-47346-1001
L1: "Inductor, 1uH, 85mR, 1.1A, LPS3010-102MRB, COILCRAFT", Supplier Part Number 1=2407993, ComponentLink1Description=Datasheet, ComponentLink1URL=http://www.farnell.com/datasheets/1805320.pdf?_ga=2.2931576.991561592.1575804886-1961576694.1568451101, Supplier 1=Farnell, Supplier 2=Mouser, Supplier Part Number 2=994-LPS3010-102MRB
L2: "Inductor, 1.5uH, 91mR, 2.5A, Bourns, SRP2510A-1R5M", Supplier Part Number 1=2774127, ComponentLink1Description=Datasheet, ComponentLink1URL=http://www.farnell.com/datasheets/2330876.pdf?_ga=2.69385304.991561592.1575804886-1961576694.1568451101, Supplier 1=Farnell
LDO1: "LDO, 1.8Vout, 1.6-6Vin, SOT-25, SMD,  HIGH SPEED LOW NOISE, TOREX - XC6221B182MR", Current - Output=200mA, Dropout Voltage Vdo="0.125V @ 100mA", Fixed Output Voltage Nom.=1.8V, Input Voltage Max=6V, LDO Regulator Case Style=SOT-25, Manufacturer=TOREX, Operating Temperature Range="-40°C to +85", Supplier Part Number 1=1454268, Accuracy %=2%, ComponentLink2Description=Datasheet, ComponentLink2URL=http://www.torex.co.jp/english/products/voltage_regulators/data/XC6221.pdf, Manufacturer Part Number=XC6221B182MR, Output Current Max=200mA, Supplier 1=Farnell, Supplier 2=Digi-Key, Supplier Part Number 2=893-1096-6-ND
LED1 LED2 LED3: library part "Generic LED", "SMD mono-color Chip LED", Color=Green
Q1 Q2: "MOSFET, P, 20V, 12A, PowerPAK SC-70-6L, SIA461DJ-T1-GE3, VISHAY", Supplier Part Number 1=2283658, ComponentLink1Description=Datasheet, ComponentLink1URL=http://www.farnell.com/datasheets/2050122.pdf?_ga=2.240431691.991561592.1575804886-1961576694.1568451101, Supplier 1=Farnell
R1 R2 R3 R4 R5 R6 R7 R8 R9 R10 R11 R12 R13 R14 R15 R16 R17 R18 R19: library part Resistor, "Resistor", Power rating=*mW, Temp coefficient=*ppm, Voltage rating=*V, Note=CurrentFootprint, Precision=*%
  R1 R3 R19: Resistance=330R
  R2 R4 R11 R12 R18: Resistance=1K
  R5 R6: Resistance=4.7K
  R7 R8 R10: Resistance=1.2K
  R9: Resistance=10K
  R13 R15 R16 R17: Resistance="1K TBD"
  R14: Resistance=470K
SW1: Contact Current Rating=300mA, Contact Resistance=70mR, Manufacturer="ITT C&K", Max Voltage Rating (DC)=6V, Operating Temperature Range="-40 .. 85°C", Supplier Part Number 1=2320017RL, ComponentLink1Description=Datasheet, ComponentLink1URL=http://www.farnell.com/datasheets/2044601.pdf?src-supplier=Element14, ComponentLink2Description=http://www1.futureelectronics.com/doc/C%20-%20K%20COMPONENTS/JS102011SAQN.pdf?src-supplier=Future+Electronics, ComponentLink2URL=http://www1.futureelectronics.com/doc/C%20-%20K%20COMPONENTS/JS102011SAQN.pdf?src-supplier=Future+Electronics, ComponentLink3Description=https://www.verical.com/server-webapp/html/getDatasheet?partID=313004&src-supplier=Verical, ComponentLink3URL=https://www.verical.com/server-webapp/html/getDatasheet?partID=313004&src-supplier=Verical, ComponentLink4Description=https://www.ckswitches.com/media/1422/js.pdf?src-supplier=Digi-Key, ComponentLink4URL=https://www.ckswitches.com/media/1422/js.pdf?src-supplier=Digi-Key, ComponentLink5Description=http://www.ck-components.com/14398/js_1nov12.pdf/?src-supplier=Avnet, ComponentLink5URL=http://www.ck-components.com/14398/js_1nov12.pdf/?src-supplier=Avnet, ComponentLink6Description=http://www.ck-components.com/14398/js_1nov12.pdf/?src-supplier=Avnet+Europe, ComponentLink6URL=http://www.ck-components.com/14398/js_1nov12.pdf/?src-supplier=Avnet+Europe, ComponentLink7Description=http://www.mouser.com/ds/2/60/JS_7jan16-221285.pdf?src-supplier=Mouser, ComponentLink7URL=http://www.mouser.com/ds/2/60/JS_7jan16-221285.pdf?src-supplier=Mouser, Current Rating=300mA, Electrical Life=5000Cycles, Manufacturer Part Number=JS102011SAQN, Mount="Surface Mount", Orientation="Right Angle", Supplier 1=Farnell, Supplier Prt Number 1=2320017, Switch Function=On-On, Voltage Rating (DC)=6V
U1: "MCU, 8-bit, 256KB flash, 50 I/Os, ATXMEGA2563U, 64-TQFP, Microchip", Supplier Part Number 1=2066307, ComponentLink1Description=Datasheet, ComponentLink1URL=http://ww1.microchip.com/downloads/en/devicedoc/atmel-8386-8-and-16-bit-avr-microcontroller-atxmega64a3u-128a3u-192a3u-256a3u_datasheet.pdf, Supplier 1=Farnell
XTAL1: Case/Package=SMD/SMT, ESR (Equivalent Series Resistance)=100R, Frequency=16MHz, Frequency Stability=30ppm, Load Capacitance=18pF, Manufacturer=TXC, Operating Temperature Range="-10°C .. 70°C", Supplier Part Number 1=1842060, ComponentLink1Description=Datasheet, ComponentLink1URL=https://datasheet.ciiva.com/1356/number-crystal-basic-1356577.pdf, ComponentLink3Description=Datasheet, ComponentLink3URL=https://datasheet.ciiva.com/855/7m-855384.pdf, Dimensions=3.2mm*2.5mm, Frequency Tolerance=30ppm, Height=0.031inch, Length=3.2mm, Manufacturer Part Number=7M-16.000MAAJ-T, Pricing 1="1=1.09, 50=0.726, 100=0.642, 250=0.625, 500=0.608, 1000=0.516, 5000=0.506 (EUR)", Supplier 1=Farnell, Supplier 2=Mouser, Supplier Part Number 2=717-7M-16.000MAAJ-T, Tolerance=30ppm

## Via types
v1: diameter 0.5, hole 0.2, Top Layer to Bottom Layer, 4 vias

## Nets (pads, with @x,y where several pads share a name; then routed paths per layer and width w, separated by ;. In a path a pad name is that pad's centre, name@x,y a point inside that pad or via, vN(x,y) a via of type N, cw(c..) or ccw(c..) an arc to the next point about the centre after c; other vN are vias at no path point)
1V8: C10.2 C12.2 C25.2 C28.2 C29.2 IC1.8 IC1.13 IC5.2 IC5.8 LDO1.5
3V3: C1.2 C2.2 C3.2 C4.2 C5.2 C6.2 C13.2 C15.2 C16.2 C17.2 C20.2 C23.2 C26.2 C27.2 C30.2 C33.2 C34.2 C39.2 D17.C DC-DC1.4 IC2.1 IC2.10 IC3.5 IC3.6 IC4.2 IC4.8 IC5.15 IC6.1 J3.2 J7.1 L1.2 LDO1.1 LDO1.3 R5.2 R6.2 U1.15 U1.25 U1.35 U1.45 U1.53 U1.61 U1.62
5V: C9.2 C11.2 C18.2 C19.2 C21.2 C36.2 C37.2 C42.1 D12.C D13.C D15.C D16.C DC-DC2.5 DC-DC2.7 DC-DC2.8 IC4.1 J4.2 J5.2 J8.2 J10.2
DebugLED1: LED1.A U1.1
DebugLED2: LED2.A U1.2
DebugLED3: LED3.A U1.3
GND: C1.1 C2.1 C3.1 C4.1 C5.1 C6.1 C7.1 C8.1 C9.1 C10.1 C11.1 C12.1 C13.1 C14.1 C15.1 C16.1 C17.1 C18.1 C19.1 C20.1 C21.1 C22.1 C23.1 C24.1 C25.1 C26.1 C27.1 C28.1 C29.1 C31.1 C32.1 C33.1 C34.1 C35.1 C36.1 C37.1 C38.1 C39.1 C40.1 C41.1 C42.2 C43.1 D1.A D2.A D3.A D4.A D5.A D6.A D7.A D8.A D9.A D10.A D11.A D12.A D13.A D14.A D15.A D16.A D17.A DC-DC1.6 DC-DC1.8 DC-DC2.1 DC-DC2.4 DC-DC2.6 DC-DC2.10 DC-DC2.15 IC1.11 IC1.18 IC1.20 IC2.3 IC2.8 IC2.9 IC3.13 IC4.7 IC5.9 IC6.4 IC7.2 IC7.3 J1.3 J2.3 J3.6 J4.1 J5.1 J6.2 J7.3 J8.1 J9.5 J10.1 LDO1.2 R7.1 R8.1 R10.1 SW1.3 U1.14 U1.24 U1.34 U1.44 U1.52 U1.60 XTAL1.2 XTAL1.4
  other v1: 104.95,58.15 106.05,58.15 104.95,59.25 106.05,59.25
Interrupt: IC1.12 IC5.6
Left_1_PWM: IC4.10 R15.2
Left_2_PWM: IC4.12 R17.2
MISO: IC1.9 IC5.4
MOSI: IC1.24 IC5.3
NetC14_2: C14.2 IC1.10
NetC22_2: C22.2 J7.2 U1.63
NetC30_1: C30.1 DC-DC1.5
NetC35_2: C35.2 DC-DC2.3
NetD1_C: D1.C J1.1 R1.1
NetD2_C: D2.C J1.2 R2.1
NetD3_C: D3.C J2.1 R3.1
NetD4_C: D4.C J2.2 R4.1
NetD5_C: D5.C J3.1 R11.1
NetD6_C: D6.C J3.5 R12.1
NetD7_C: D7.C J4.3 R13.1
NetD8_C: D8.C J5.3 R15.1
NetD9_C: D9.C J8.3 R16.1
NetD10_C: D10.C J10.3 R17.1
NetD11_C: D11.C IC6.2 R18.1
NetD14_C: D14.C IC6.3 R19.1
NetDC-DC1_1: DC-DC1.1 L1.1
NetDC-DC2_9: DC-DC2.9 L2.2
NetDC-DC2_11: DC-DC2.11 L2.1
NetDC-DC2_14: DC-DC2.14 R9.1
NetIC2_2: IC2.2 U1.33
NetIC2_4: IC2.4 U1.31
NetIC2_5: IC2.5 U1.32
NetIC2_6: IC2.6 U1.30
NetIC2_7: IC2.7 U1.6
NetIC3_10: IC3.10 R5.1 U1.36
NetIC3_11: IC3.11 R6.1 U1.37
NetIC4_3: IC4.3 U1.16
NetIC4_4: IC4.4 U1.17
NetIC4_5: IC4.5 U1.18
NetIC4_6: IC4.6 U1.19
NetIC5_11: IC5.11 U1.7
NetIC5_12: IC5.12 U1.40
NetIC5_13: IC5.13 U1.42
NetIC5_14: IC5.14 U1.41
NetIC5_16: IC5.16 U1.43
NetIC7_4: IC7.4 Q1.G R14.1
NetIC7_5: IC7.5 Q2.G
NetLED1_C: LED1.C R7.2
NetLED2_C: LED2.C R8.2
NetLED3_C: LED3.C R10.2
NetR1_2: R1.2 U1.28
NetR2_2: R2.2 U1.29
NetR3_2: R3.2 U1.48
NetR4_2: R4.2 U1.49
NetR18_2: R18.2 U1.39
NetR19_2: R19.2 U1.38
PDI_CLOCK: R12.2 U1.57
PDI_DATA: R11.2 U1.56
PowerOn: DC-DC1.2 R9.2 SW1.2
Right_1_PWM: IC4.9 R13.2
Right_2_PWM: IC4.11 R16.2
SCK: IC1.23 IC5.1
SS: IC1.22 IC5.5
Vbat: C7.2 IC7.1 J6.1 Q2.D
Vcc: C24.2 C31.2 C32.2 C38.2 C41.2 DC-DC1.7 DC-DC2.12 DC-DC2.13 IC7.6 Q1.S Q2.S R14.2 SW1.1
Vusb: C8.2 J9.1 Q1.D
XTAL1: C43.2 U1.59 XTAL1.3
XTAL2: C40.2 U1.58 XTAL1.1
pads on no net: DC-DC1.3 DC-DC2.2 IC1.1 IC1.2 IC1.3 IC1.4 IC1.5 IC1.6 IC1.7 IC1.14 IC1.15 IC1.16 IC1.17 IC1.19 IC1.21 IC1.25 IC3.1 IC3.2 IC3.3 IC3.4 IC3.7 IC3.8 IC3.9 IC3.12 IC3.14 IC3.15 IC3.16 IC5.7 IC5.10 IC6.5 J3.3 J3.4 J6.0 J9.2 J9.3 J9.4 J9.6 LDO1.4 SW1.4 SW1.5 U1.4 U1.5 U1.8 U1.9 U1.10 U1.11 U1.12 U1.13 U1.20 U1.21 U1.22 U1.23 U1.26 U1.27 U1.46 U1.47 U1.50 U1.51 U1.54 U1.55 U1.64

## Text inside footprints (layer, text, board x,y; h text height)
J1: Top Overlay "TX" at 106.9,113.5 h0.6 r90; Top Overlay "RX" at 106.9,111 h0.6 r90; Top Overlay "GND" at 106.9,115.9 h0.6 r90
J2: Top Overlay "TX" at 88.4,113.5 h0.6 r90; Top Overlay "RX" at 88.4,111 h0.6 r90; Top Overlay "GND" at 88.4,115.9 h0.6 r90